# Allegro board 2019-09-26.brd
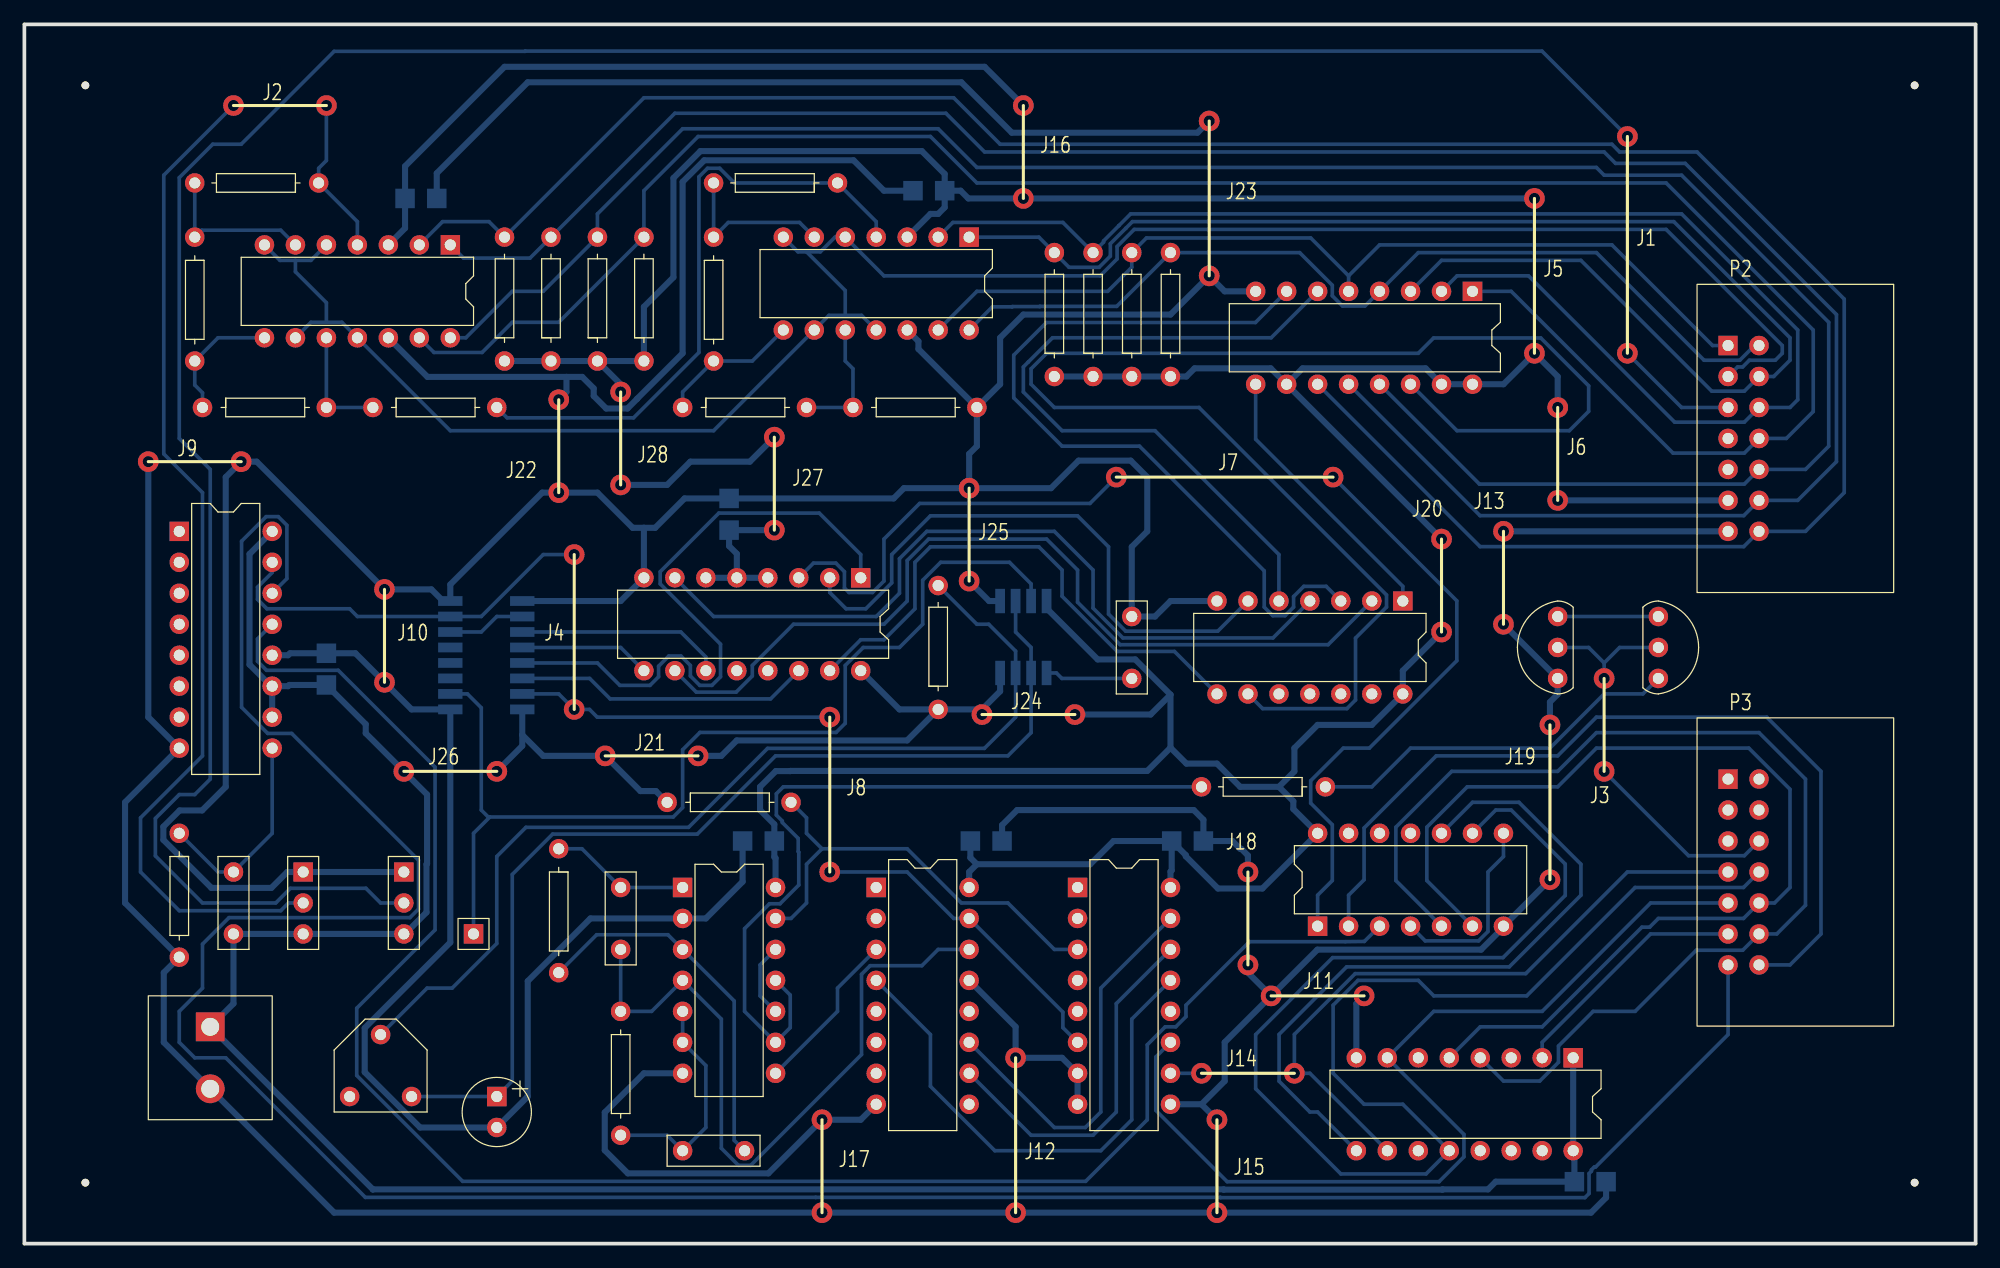
[diagram p0: board, top side]
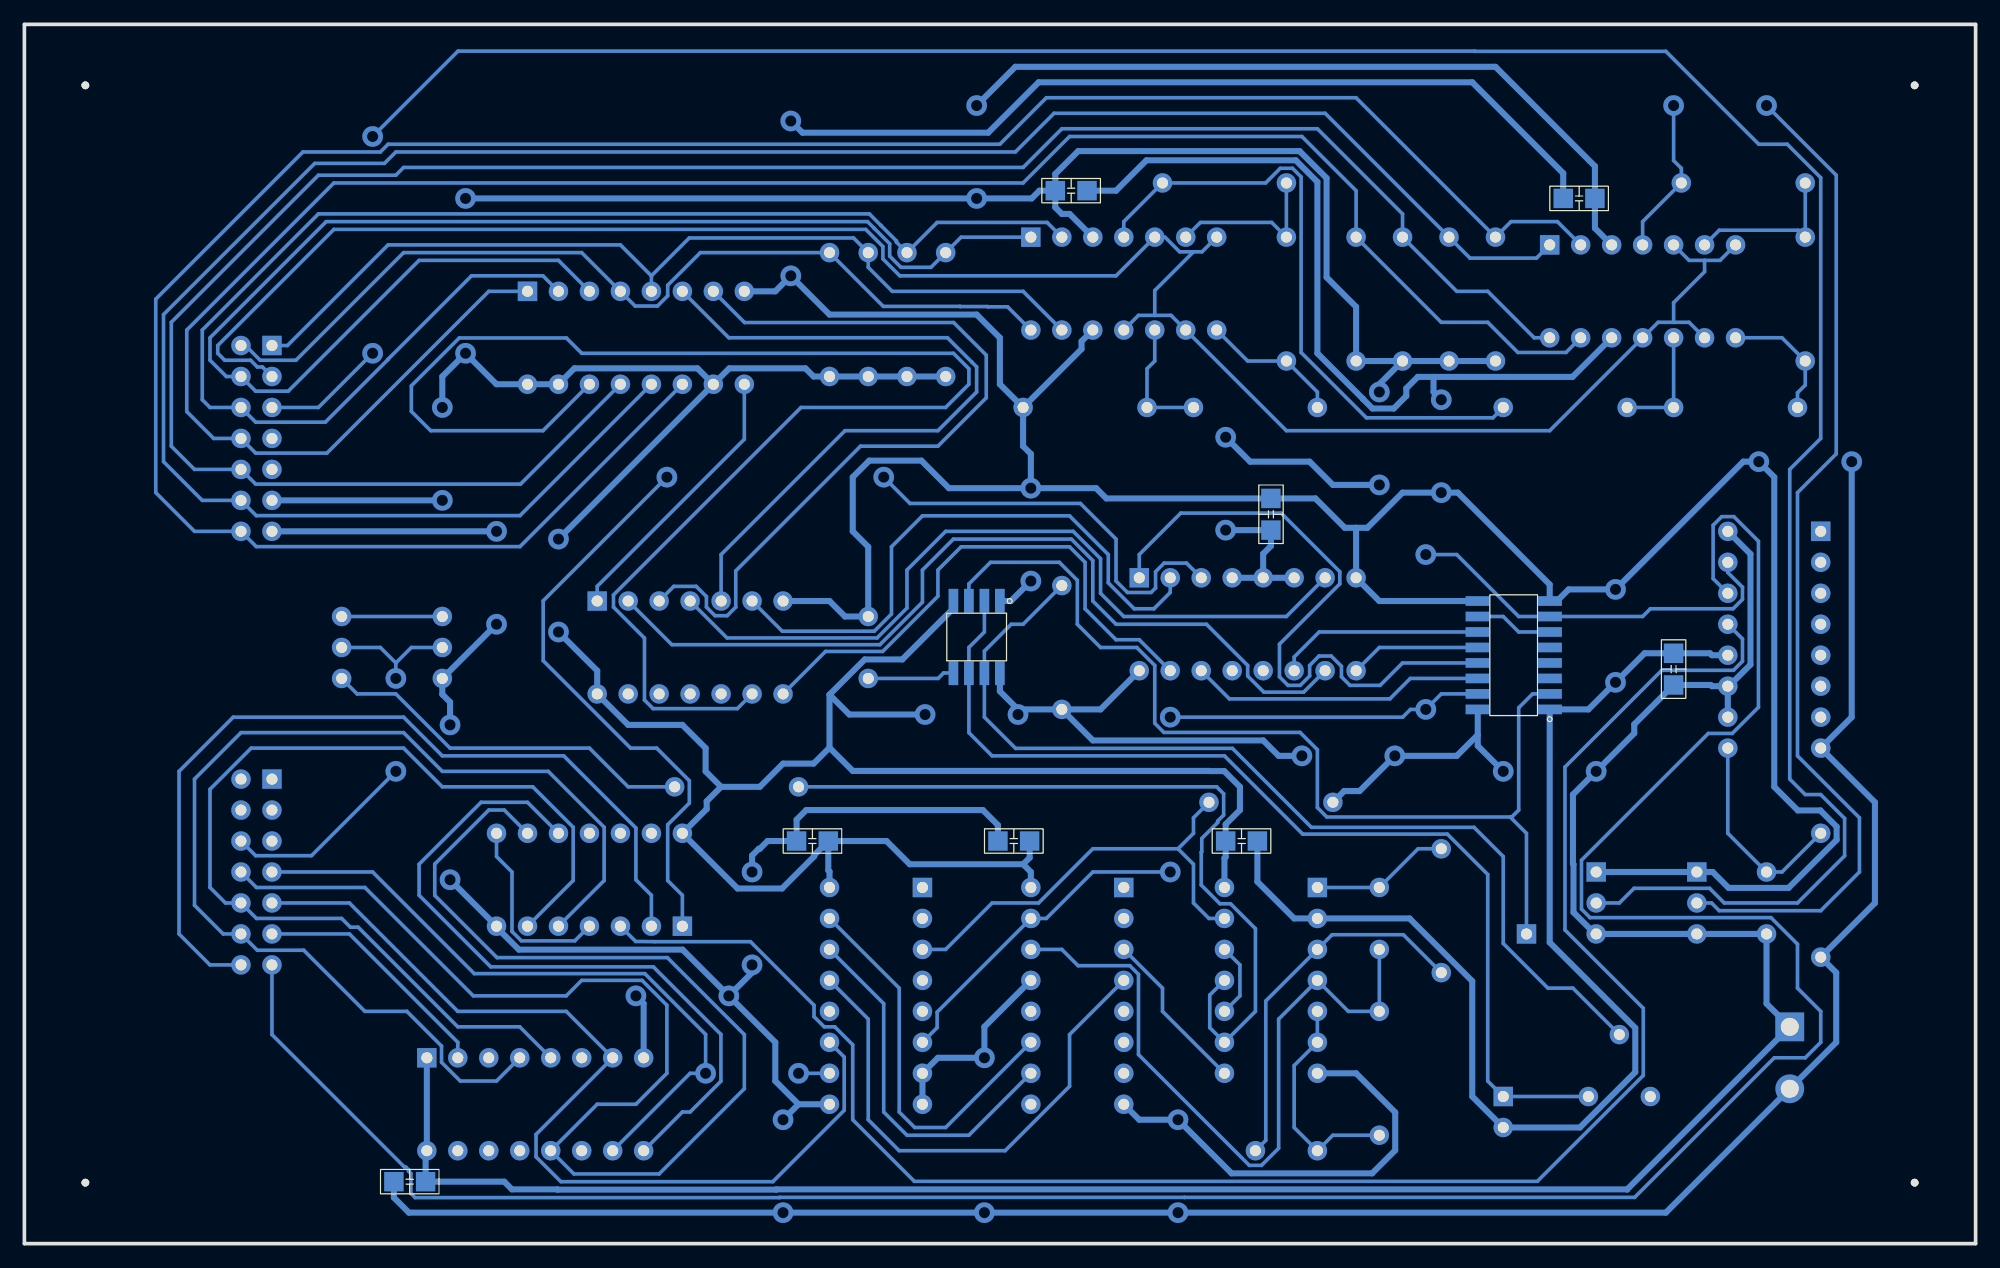
[diagram p1: board, bottom side, seen from below]

Outline 160 x 100 mm; copper layers: TOP, BOTTOM. Coordinates in mm from the lower left corner of the outline.
Outline path: 0,100 0,0 160,0 160,100 0,100

## Design rules (mm)
nets with their own width: min track width 0.5; nets +5V GND

## Placement (name value [footprint] x y rotation side)
C1  10uF  [CAP196]  38.73 12.06 0 top
C2  0.1uF  [CAP300]  90.81 46.35 90 top
C3  0.1uF  [CAP300]  17.14 25.4 90 top
C4  0.01uF  [CAP300]  48.9 29.21 270 top
C5  0.01uF  [CAP300]  59.05 7.62 180 top
C6  0.1uF  [SMDCAP]  31.11 85.72 0 bottom
C7  0.1uF  [SMDCAP]  75.56 86.36 180 bottom
C8  0.1uF  [SMDCAP]  57.78 58.42 90 bottom
C9  0.1uF  [SMDCAP]  24.77 45.72 90 bottom
C10  0.1uF  [SMDCAP]  61.59 33.02 180 bottom
C11  0.1uF  [SMDCAP]  77.47 33.02 0 bottom
C12  0.1uF  [SMDCAP]  93.98 33.02 0 bottom
C13  0.1uF  [SMDCAP]  127 5.08 0 bottom
J1  -  [JUMPER6]  131.44 73.03 270 bottom
J2  -  [JUMPER2]  17.14 93.34 180 bottom
J3  -  [JUMPER2]  129.54 38.73 270 bottom
J4  -  [JUMPER4]  45.09 43.81 270 bottom
J5  -  [JUMPER4]  123.83 73.03 270 bottom
J6  -  [JUMPER2]  125.73 60.96 270 bottom
J7  -  [JUMPER6]  107.31 62.87 0 bottom
J8  -  [JUMPER4]  66.04 30.48 270 bottom
J9  -  [JUMPER2]  10.16 64.14 180 bottom
J10  -  [JUMPER2]  29.53 46.04 270 bottom
J11  -  [JUMPER2]  109.86 20.32 0 bottom
J12  -  [JUMPER4]  81.28 2.54 270 bottom
J13  -  [JUMPER2]  121.28 58.42 90 bottom
J14  -  [JUMPER2]  104.14 13.97 0 bottom
J15  -  [JUMPER2]  97.79 10.16 90 bottom
J16  -  [JUMPER2]  81.92 85.72 270 bottom
J17  -  [JUMPER2]  65.41 2.54 270 bottom
J18  -  [JUMPER2]  100.33 22.86 270 bottom
J19  -  [JUMPER4]  125.09 29.84 270 bottom
J20  -  [JUMPER2]  116.2 50.16 270 bottom
J21  -  [JUMPER2]  47.62 40.01 180 bottom
J22  -  [JUMPER2]  43.81 69.22 90 bottom
J23  -  [JUMPER4]  97.16 79.38 270 bottom
J24  -  [JUMPER2]  78.52 43.4 180 bottom
J25  -  [JUMPER2]  77.47 54.34 270 bottom
J26  -  [JUMPER2]  38.73 38.73 0 bottom
J27  -  [JUMPER2]  61.49 58.52 270 bottom
J28  -  [JUMPER2]  48.9 69.85 90 bottom
NOREF  -  [unnamed]  155 5 0 top
NOREF#2  -  [unnamed]  5 95 0 top
NOREF#3  -  [#2]  0 0 0 top
NOREF#4  -  [#2]  0 0 90 top
NOREF#5  -  [unnamed]  5 5 0 top
NOREF#6  -  [unnamed]  155 95 0 top
P1  CON2  [POWER2]  15.24 17.78 270 top
P2  CON14  [JUMPER14]  139.7 73.66 270 top
P3  CON14  [JUMPER14]  139.7 38.1 270 top
Q1  2SC1815  [TO92]  133.99 51.44 270 top
Q2  2SC1815  [TO92]  125.73 46.35 90 top
R1  10K  [RES400]  74.93 43.81 0 top
R2  10K  [RES400]  24.13 87 90 top
R3  10K  [RES400]  13.97 82.55 180 top
R4  10K  [RES400]  14.61 68.58 270 top
R5  10K  [RES400]  28.57 68.58 270 top
R6  10K  [RES400]  66.67 87 90 top
R7  10K  [RES400]  56.52 82.55 180 top
R8  10K  [RES400]  53.98 68.58 270 top
R9  100  [RES400]  67.94 68.58 270 top
R10  4.7K  [RES400]  39.37 72.39 0 top
R11  4.7K  [RES400]  43.18 72.39 0 top
R12  4.7K  [RES400]  46.99 72.39 0 top
R13  4.7K  [RES400]  50.8 72.39 0 top
R14  4.7K  [RES400]  87.63 71.12 0 top
R15  4.7K  [RES400]  84.45 71.12 0 top
R16  4.7K  [RES400]  93.98 71.12 0 top
R17  4.7K  [RES400]  90.81 71.12 0 top
R18  680K  [RES400]  12.7 33.66 180 top
R19  10K  [RES400]  43.81 32.38 180 top
R20  10K  [RES400]  48.9 19.05 180 top
R21  10K  [RES400]  52.7 36.2 270 top
R22  1K  [RES400]  106.68 37.47 90 top
TP1  TP  [JUMPER1]  36.83 25.4 0 top
U1  NE555  [SOP8]  80.01 52.7 270 bottom
U2  LM339  [DIP14_3]  34.92 81.92 270 top
U3  LM339  [DIP14_3]  77.47 82.55 270 top
U4  40147  [DIP16_3]  118.75 78.11 270 top
U5  4069  [DIP14_3]  113.03 52.7 270 top
U6  4518  [SOP16]  34.92 43.81 0 bottom
U7  4585  [DIP16_3]  68.58 54.61 270 top
U8  4027  [DIP16_3]  12.7 58.42 0 top
U9  4071  [DIP14_3]  106.05 26.04 90 top
U10  4001  [DIP14_3]  53.98 29.21 0 top
U11  4017  [DIP16_3]  69.85 29.21 0 top
U12  4051  [DIP16_3]  86.36 29.21 0 top
U13  4175  [DIP16_3]  127 15.24 270 top
VR1  1M  [RESADJ]  31.75 12.06 270 top
VR2  100K  [JUMPER3]  22.86 30.48 270 top
VR3  10K  [JUMPER3]  31.11 30.48 270 top

## Library data of the parts
C1 = Cap Pol
C2-C5 = Cap NP: Tolerance: ***; User Part Number: ***
C6-C13 = Cap TEXT
J1-J28 = JUMPER
P1 = CON2
P2 P3 = CON14: User Part Number: ***
Q1 Q2 = 2SC1815
R1-R22 = resistor: Tolerance: ***; User Part Number: ***
TP1 = TP: User Part Number: ***
U1 = NE555
U2 U3 = LM339: Tolerance: ***; User Part Number: ***
U4 = 40147: Tolerance: ***; User Part Number: ***
U5 = 4069: Tolerance: ***; User Part Number: ***
U6 = 4518
U7 = 4585: Tolerance: ***; User Part Number: ***
U8 = 4027: Tolerance: ***; User Part Number: ***
U9 = 4071: Tolerance: ***; User Part Number: ***
U10 = 4001: Tolerance: ***; User Part Number: ***
U11 = 4017: Tolerance: ***; User Part Number: ***
U12 = 4051: Tolerance: ***; User Part Number: ***
U13 = 4175: Tolerance: ***; User Part Number: ***
VR1 = VR1: Tolerance: ***; User Part Number: ***
VR2 VR3 = VR2: User Part Number: ***

## Footprints (pads in the part's own frame, mm; a bottom-side part is the same pattern mirrored in y, then rotated)
CAP196
  rect 1.6x1.6 hole 0.914: 1(0,0)
  round 1.6 hole 0.91: 2(0,-2.54)
CAP300
  round 1.6 hole 0.91: 1(0,0) 2(5.08,0)
DIP14_3
  rect 1.6x1.6 hole 0.914: 1(0,0)
  round 1.6 hole 0.91: 2(0,-2.54) 3(0,-5.08) 4(0,-7.62) 5(0,-10.16) 6(0,-12.7) 7(0,-15.24) 8(7.62,-15.24) 9(7.62,-12.7) 10(7.62,-10.16) 11(7.62,-7.62) 12(7.62,-5.08) 13(7.62,-2.54) 14(7.62,0)
DIP16_3
  rect 1.6x1.6 hole 0.914: 1(0,0)
  round 1.6 hole 0.91: 2(0,-2.54) 3(0,-5.08) 4(0,-7.62) 5(0,-10.16) 6(0,-12.7) 7(0,-15.24) 8(0,-17.78) 9(7.62,-17.78) 10(7.62,-15.24) 11(7.62,-12.7) 12(7.62,-10.16) 13(7.62,-7.62) 14(7.62,-5.08) 15(7.62,-2.54) 16(7.62,0)
JUMPER1
  rect 1.6x1.6 hole 0.914: 1(0,0)
JUMPER3
  rect 1.6x1.6 hole 0.914: 1(0,0)
  round 1.6 hole 0.91: 2(2.54,0) 3(5.08,0)
JUMPER14
  rect 1.6x1.6 hole 0.914: 1(0,0)
  round 1.6 hole 0.91: 2(0,2.54) 3(2.54,0) 4(2.54,2.54) 5(5.08,0) 6(5.08,2.54) 7(7.62,0) 8(7.62,2.54) 9(10.16,0) 10(10.16,2.54) 11(12.7,0) 12(12.7,2.54) 13(15.24,0) 14(15.24,2.54)
POWER2
  rect 2.362x2.362 hole 1.473: 1(0,0)
  round 2.362 hole 1.473: 2(5.08,0)
RES400
  round 1.6 hole 0.91: 1(0,0) 2(0,10.16)
RESADJ
  round 1.6 hole 0.91: 1(0,0) 2(-5.08,-2.54) 3(0,-5.08)
SMDCAP
  rect 1.6x1.6 smd: 1(0.1,0) 2(2.7,0)
SOP8
  rect 2x0.8 smd: 1(0,0) 2(0,-1.27) 3(0,-2.54) 4(0,-3.81) 5(5.9,-3.81) 6(5.9,-2.54) 7(5.9,-1.27) 8(5.9,0)
SOP16
  rect 2x0.8 smd: 1(0,0) 2(0,-1.27) 3(0,-2.54) 4(0,-3.81) 5(0,-5.08) 6(0,-6.35) 7(0,-7.62) 8(0,-8.89) 9(5.9,-8.89) 10(5.9,-7.62) 11(5.9,-6.35) 12(5.9,-5.08) 13(5.9,-3.81) 14(5.9,-2.54) 15(5.9,-1.27) 16(5.9,0)
TO92
  round 1.6 hole 0.91: 1(0,0) 2(2.54,0) 3(5.08,0)
unnamed
  round 0.635 hole 3 unplated: (0,0)

## Nets
+5V: C3.1 C6.1 C7.1 C8.1 C9.1 C10.1 C11.1 C12.1 C13.1 P1.1 P2.11 R1.1 R10.1 R11.1 R12.1 R13.1 R14.1 R15.1 R16.1 R17.1 R21.1 U1.4(RST) U1.8(VCC) U2.3 U3.3 U4.10(I\9\) U4.15(I\0\) U4.16(VCC) U5.14 U6.16 U7.4(A>BIN) U7.5(A<BIN) U7.6(A=BIN) U7.16(VCC) U8.10(J) U8.11(K) U8.16 U9.14 U10.14 U11.16(VCC) U12.16(VCC) U13.1(R\S\T\) U13.16(VCC) VR2.3(A) VR3.3(A)
GND: C1.2 C2.2 C6.2 C7.2 C8.2 C9.2 C10.2 C11.2 C12.2 C13.2 P1.2 P2.13 Q2.1(B) R9.2 R18.2 U1.1(GND) U2.12 U3.12 U4.8(GND) U5.7 U6.1(CLK) U6.8 U6.9(CLK) U7.8(GND) U8.8 U8.12(RST) U9.7 U10.2(I1) U10.7 U11.8(GND) U11.13(C\K\E\N\) U12.7(VEE) U12.8(GND) U12.9(C) U13.8(GND) VR2.1(WIPER) VR3.1(WIPER)
AD0: P2.14 R10.2 U2.2(OUT) U4.11(I\1\)
AD1: P2.12 R11.2 U2.1(OUT) U4.12(I\2\)
AD2: P2.10 R12.2 U2.14(OUT) U4.13(I\3\)
AD3: P2.8 R13.2 U2.13(OUT) U4.1(I\4\)
AD4: P2.6 R14.2 U3.2(OUT) U4.2(I\5\)
AD5: P2.4 R15.2 U3.1(OUT) U4.3(I\6\)
AD6: P2.2 R16.2 U3.14(OUT) U4.4(I\7\)
AD7: P2.1 R17.2 U3.13(OUT) U4.5(I\8\)
CLK: TP1.1 U1.3(OUT) U6.2(EN)
MOTOR-GND: P3.6 Q1.2(C) Q2.2(C)
MR: U6.7(CLR) U6.15(CLR) U8.15(Q) U11.15(RST) U12.6(E\N\)
MR2: P3.13 U8.14(Q\)
SW1: P3.14 U9.2(I1)
SW2: P3.12 U9.5(I0) U13.4(D0)
SW3: P3.10 U9.6(I1) U13.5(D1)
SW4: P3.8 U9.9(I1) U13.12(D2)
SWLED1: P3.11 U13.2(Q0)
SWLED2: P3.9 U12.11(A) U13.7(Q1)
SWLED3: P3.7 U12.10(B) U13.10(Q2)
VR3: P2.5 VR3.2(B)
VR-LED: P2.3 U2.5(+IN) U2.7(+IN) U2.9(+IN) U2.11(+IN) U3.5(+IN) U3.7(+IN) U3.9(+IN) U3.11(+IN)
N01738: R2.2 R3.1 U2.6(-IN)
N01832: R2.1 U2.4(-IN) VR2.2(B)
N01869: R3.2 R4.1 U2.8(-IN)
N02026: R4.2 R5.1 U2.10(-IN)
N02113: R5.2 R6.1 U3.4(-IN)
N02200: R6.2 R7.1 U3.6(-IN)
N02287: R7.2 R8.1 U3.8(-IN)
N02374: R8.2 R9.1 U3.10(-IN)
N03318: U4.9(A\) U5.1(I)
N03322: U4.7(B\) U5.3(I)
N03329: U4.6(C\) U5.5(I)
N03383: U4.14(D\) U5.9(I)
N03395: U5.8(O) U7.15(A3)
N03402: U5.6(O) U7.2(A2)
N03414: U5.4(O) U7.7(A1)
N03426: U5.2(O) U7.10(A0)
N03450: U6.11(Q0) U7.11(B0)
N03452: U6.12(Q1) U7.9(B1)
N03454: U6.13(Q2) U7.1(B2)
N03456: U6.14(Q3) U7.14(B3)
N03470: U6.6(Q3) U6.10(EN)
N03744: C3.2 R18.1 U8.9(SET)
N03768: U7.3(A=BOUT) U9.1(I0)
N03793: U8.13(CLK) U9.3(O)
N03830: R1.2 U1.7(DISC) VR1.2
N03834: C1.1 U1.2(TRIG) U1.6(THR) VR1.1
N03876: C2.1 U1.5(CV)
N11046: C4.2 R20.1 U10.4(O) U11.14(CLK)
N11054: C5.2 R20.2 U10.5(I0) U10.6(I1)
N11096: C5.1 R19.2 U10.3(O)
N11143: C4.1 R19.1 U10.1(I0)
N11271: U9.10(O) U13.9(CLK)
N11279: U9.4(O) U9.8(I0)
N11295: U10.8(I0) U11.3(0)
N11327: U11.11(9) U12.15(X2)
N11354: U11.10(4) U12.14(X1)
N11366: U11.4(2) U12.13(X0)
N11378: R21.2 U10.13(I1) U12.3(X)
N11401: U10.10(O) U10.12(I0)
N11416: R22.2 U10.9(I1) U10.11(O)
N11515: Q1.1(B) Q2.3(E)
N11541: Q1.3(E) R22.1

Pads without a net: P2 7 9; P3 1 2 3 4 5; U5 10 11 12 13; U6 3 4 5; U7 12 13; U8 1 2 3 4 5 6 7; U9 11 12 13; U11 1 2 5 6 7 9 12; U12 1 2 4 5 12; U13 3 6 11 13 14 15; VR1 3

## Via types
v1: diameter 1.7, hole 0.91, TOP to BOTTOM, 56 vias

## Routing (per net, layer and track width the routed paths; a pad name or vN(x,y) marks a point on that pad's centre or on a via; arc(x,y) is an arc through that point)
+5V: length 679
  BOTTOM w0.5: v1(123.83,85.72) v1(81.92,85.72) 77.4,85.72 76.77,86.36 C7.1 ; R21.1 51.78,37.12 50.51,37.12 v1(47.62,40.01) 42.55,40.01 40.83,41.73 ; 102.87,37.47 99.69,37.47 97.79,39.37 95.28,39.37 93.98,40.67 ; 102.87,37.47 104.14,38.74 104.14,40.64 106.05,42.55 110.49,42.55 U5.14 113.03,46.99 v1(116.2,50.16) ; 102.87,37.47 104.05,36.28 104.05,35.65 U9.14 101.52,29.13 97.87,29.13 95.24,31.76 95.24,31.86 C12.1 ; U10.14 61.59,31.62 61.49,31.72 C10.1 61.49,34.39 60.33,35.56 60.33,37.46 61.61,38.75 62.8,38.75 62.81,38.77 92.08,38.77 93.98,40.67 ; U12.16 93.98,30.51 94.08,30.61 C12.1 ; U7.5 U7.6 ; U7.5 U7.4 ; U7.5 58.42,56.58 57.78,57.22 C8.1 v1(61.49,58.52) ; C12.1 89.31,33.02 87.4,31.11 78.11,31.11 ; 78.11,31.11 77.47,30.48 U11.16 ; 78.11,31.11 77.57,31.65 C11.1 ; R1.1 78.52,43.81 ; R1.1 71.75,43.81 U7.16 ; R1.1 72.39,41.27 58.42,41.27 57.15,40.01 v1(55.24,40.01) ; 78.52,43.81 80.01,45.3 U1.8 ; 78.52,43.81 v1(78.52,43.4) ; v1(48.9,62.23) 52.7,62.23 54.61,64.14 59.49,64.14 v1(61.49,66.14) ; R15.1 R14.1 R17.1 R16.1 95.28,71.12 95.95,71.79 102.2,71.79 103.5,70.48 ; v1(125.73,68.58) 125.73,71.12 v1(123.83,73.03) 121.28,70.48 U4.16 U4.15 114.9,71.79 104.81,71.79 103.5,70.48 ; C7.1 75.47,87.73 73.59,89.61 55.43,89.61 53.22,87.39 53.22,79.26 50.8,76.83 R13.1 R12.1 ; C7.1 75.47,84.99 74.93,84.45 74.3,84.45 U3.3 ; P2.11 v1(125.73,60.96) ; 93.98,45.02 92.35,43.4 v1(86.14,43.4) ; 93.98,45.02 93.98,40.67 ; 93.98,45.02 91.09,47.91 88.01,47.91 83.82,52.1 U1.4 ; R12.1 48.9,70.48 v1(48.9,69.85) ; R12.1 R11.1 R10.1 ; 40.83,41.73 40.83,40.83 v1(38.73,38.73) ; 40.83,41.73 U6.16 ; v1(81.92,93.34) 78.74,96.52 39.37,96.52 31.21,88.36 C6.1 31.21,83.28 U2.3 ; U8.11 U8.10 ; U8.11 20.23,45.72 18.46,47.49 18.46,56.56 U8.16 ; U8.11 21.62,45.72 21.72,45.82 C9.1 27.99,42.59 27.99,41.86 v1(31.11,38.73) 33.02,36.83 33.02,31.16 32.97,31.11 32.97,27.17 31.2,25.4 VR3.3 VR2.3 C3.1 17.14,19.68 P1.1 28.57,4.45 28.58,4.45 98.33,4.45 98.36,4.43 116.27,4.43 116.3,4.45 120.02,4.45 120.65,5.08 C13.1 127.1,7.52 U13.16 U13.1 ; 103.5,70.48 v1(116.2,57.78)
GND: length 799.8
  BOTTOM w0.5: U2.12 33.05,71.09 44.45,71.09 ; v1(102.23,20.32) 106.03,24.11 119.45,24.11 121.28,25.95 U9.7 v1(125.09,29.84) ; v1(102.23,20.32) 98.42,16.51 98.42,13.34 96.52,11.43 ; v1(102.23,20.32) 100.33,22.23 v1(100.33,22.86) ; U11.8 68.58,10.16 v1(65.41,10.16) 61.01,5.76 49.48,5.76 47.59,7.65 47.59,10.76 50.8,13.97 U10.7 ; VR3.1 VR2.1 21.56,30.48 20.25,29.18 15.33,29.18 11.4,33.11 11.4,34.2 12.73,35.53 14.57,35.53 16.51,37.47 16.51,62.87 v1(17.78,64.14) 19.05,64.14 v1(29.53,53.66) 33.37,53.66 34.33,52.7 U6.8 34.92,54.06 42.46,61.59 v1(43.81,61.59) 46.99,61.59 49.88,58.71 50.8,58.71 ; 44.45,71.09 45.74,71.09 46.68,70.15 46.68,69.52 47.71,68.5 49.46,68.5 50.25,69.29 50.25,69.3 53.98,73.03 53.98,87.08 55.75,88.85 67.99,88.85 70.48,86.36 C7.2 ; 44.45,71.09 44.45,69.85 v1(43.81,69.22) ; 58.9,33.02 58.9,29.68 55.88,26.67 U10.2 46.42,26.67 41.27,21.53 41.27,12.06 C1.2 32.45,9.53 27.91,14.06 27.91,17.69 34.92,24.7 U6.1 31.75,43.81 v1(29.53,46.04) 27.14,48.42 C9.2 21.78,48.42 21.62,48.26 U8.12 ; U3.12 73.31,74.01 73.31,73.37 R9.2 ; P2.13 v1(121.28,58.42) ; C11.2 80.17,34.32 81.41,35.56 95.89,35.56 96.68,34.77 C12.2 99.06,33.02 99.69,32.38 99.78,32.38 100.33,31.83 v1(100.33,30.48) ; U1.1 79.11,52.7 v1(77.47,54.34) ; C13.2 129.7,3.78 128.46,2.54 v1(97.79,2.54) v1(81.28,2.54) v1(65.41,2.54) 25.4,2.54 P1.2 11.43,16.51 11.43,22.23 R18.2 8.26,27.94 8.26,36.2 U8.8 10.16,43.18 v1(10.16,64.14) ; R9.2 78.11,65.41 77.47,64.77 v1(77.47,61.96) ; R9.2 80.01,70.48 80.01,74.3 81.92,76.2 93.98,76.2 v1(97.16,79.38) 98.42,78.11 U4.8 ; 50.8,58.71 U7.8 48.9,52.7 U6.9 ; 50.8,58.71 51.72,58.71 54.13,61.12 C8.2 71.28,61.12 72.12,61.96 v1(77.47,61.96) ; U11.13 81.28,17.78 v1(81.28,15.24) 85.09,15.24 U12.7 U12.8 ; v1(109.86,20.32) 109.22,19.68 U13.8 ; C6.2 33.81,87.79 41.27,95.25 76.83,95.25 80.97,91.12 96.2,91.12 v1(97.16,92.08) ; 96.52,11.43 U12.9 ; 96.52,11.43 v1(97.79,10.16) ; v1(121.28,50.8) Q2.1 125.73,45.05 125.09,44.42 v1(125.09,42.55) ; U5.7 93.98,52.7 92.71,51.44 90.81,51.44 90.81,57.15 92.08,58.42 92.08,62.87 90.72,64.22 86.44,64.22 84.19,61.96 v1(77.47,61.96)
AD0: length 196.1
  BOTTOM w0.3: U2.2 34.29,83.82 38.1,83.82 R10.2 50.8,93.98 76.2,93.98 80.01,90.17 130.18,90.17 130.81,89.53 137.16,89.53 149.22,77.47 149.22,61.59 146.05,58.42 P2.14 140.99,57.17 119.36,57.17 U4.11
AD1: length 184.2
  BOTTOM w0.3: 108.58,70.48 119.36,59.71 140.99,59.71 P2.12 145.41,60.96 148.59,64.14 148.59,76.2 136.19,88.6 130.48,88.6 129.54,89.53 78.74,89.53 75.56,92.71 53.34,92.71 R11.2 41.46,80.83 36.01,80.83 U2.1
AD2: length 179.5
  BOTTOM w0.3: U4.13 119.31,62.3 141.04,62.3 P2.10 146.05,63.5 147.96,65.41 147.96,75.56 135.89,87.63 129.54,87.63 128.91,88.27 78.11,88.27 74.93,91.44 53.98,91.44 46.99,84.45 R12.2 42.55,78.11 40.01,78.11 36.2,74.3 U2.14
AD3: length 172.5
  BOTTOM w0.3: U4.1 121.92,78.11 135.19,64.84 141.04,64.84 P2.8 144.48,66.04 146.69,68.25 146.69,74.93 134.62,87 78.1,87 74.29,90.81 55.24,90.81 50.8,86.36 R13.2 43.81,75.56 40.01,75.56 37.53,73.09 33.59,73.09 U2.13
AD4: length 118.5
  BOTTOM w0.3: U4.2 117.47,79.38 123.34,79.38 130.19,72.52 130.19,72.51 135.32,67.38 141.04,67.38 P2.6 144.78,68.58 145.41,69.22 145.41,74.93 135.89,84.45 90.71,84.45 89.75,83.5 89.75,83.5 88.49,82.24 88.49,82.14 R14.2 85.16,83.75 76.13,83.75 U3.2
AD5: length 113.9
  BOTTOM w0.3: U3.1 83.19,82.55 R15.2 85.66,80.08 88.13,80.08 89.05,80.99 89.05,82.01 90.31,83.27 90.86,83.82 135.25,83.82 144.78,74.3 144.78,72.46 143.44,71.12 P2.4 141.04,69.92 138.36,69.92 127.63,80.64 116.2,80.64 U4.3
AD6: length 75.7
  BOTTOM w0.3: U3.14 79.38,76.83 80.99,76.83 81.01,76.85 83.26,76.85 83.28,76.87 89.57,76.87 R16.2 104.57,81.28 107.25,78.6 107.25,77.74 108.09,76.9 109.92,76.9 U4.4 114.3,81.28 128.91,81.28 137.73,72.46 140.67,72.46 141.6,73.38 141.96,73.38 P2.2
AD7: length 75.6
  BOTTOM w0.3: 108.58,79.38 105.48,82.48 92.01,82.48 R17.2 90.81,80.08 88.83,78.11 78.11,78.11 U3.13 ; 108.58,79.38 108.58,78.11 ; 108.58,79.38 111.12,81.92 130.18,81.92 138.43,73.66 P2.1
CLK: length 85.3
  BOTTOM w0.3: TP1.1 36.83,33.66 38.17,34.99 ; U1.3 82.55,54.11 80.78,55.88 75.13,55.88 73.66,54.41 73.66,50.8 71.76,48.9 68.78,48.9 67.31,47.42 67.31,42.68 66.56,41.93 55.39,41.93 53.98,40.51 53.98,35.76 53.2,34.99 38.17,34.99 ; 38.17,34.99 38.03,34.99 37.47,35.56 37.47,43.95 36.33,45.09 U6.2
MOTOR-GND: length 26.6
  BOTTOM w0.3: v1(129.54,46.35) 129.54,47.62 ; 129.54,47.62 128.27,48.9 125.73,48.9 ; 129.54,47.62 130.81,48.9 Q1.2 ; v1(129.54,38.73) 136.46,31.82 141.04,31.82 P3.6
MR: length 85
  BOTTOM w0.3: v1(66.04,43.18) 46.97,43.18 46.34,43.81 v1(45.09,43.81) 43.81,45.09 U6.15 ; U8.15 20.32,55.04 19.12,53.84 19.12,52.84 19.89,52.07 26.67,52.07 27.3,51.44 37.47,51.44 42.55,56.52 v1(45.09,56.52) ; v1(66.04,30.48) 72.39,30.48 76.2,26.67 U11.15 85.16,18.98 85.16,17.71 U12.6
MR2: length 220.6
  BOTTOM w0.3: P3.13 139.7,17.14 128.84,6.28 128.73,6.28 128.5,6.05 128.5,5.94 128.3,5.75 128.3,4.11 127.96,3.77 98.09,3.77 98.06,3.79 64.89,3.79 64.88,3.79 27.96,3.79 16.51,15.24 13.97,15.24 12.7,16.51 12.7,19.05 14.61,20.95 14.61,24.56 16.78,26.74 31.61,26.74 32.32,27.44 32.32,31.45 21.92,41.84 19.95,41.84 17.81,43.99 17.81,57.61 19.82,59.62 20.82,59.62 21.52,58.92 21.52,54.54 U8.14
SW1: length 71.1
  BOTTOM w0.3: 108.58,26.04 108.58,28.57 109.86,29.84 109.86,34.09 115.77,40.01 125.73,40.01 128.9,43.18 142.88,43.18 147.32,38.73 147.32,25.4 144.78,22.86 P3.14
SW2: length 92.6
  BOTTOM w0.3: U9.5 112.46,29.78 112.46,34.15 117.04,38.73 125.73,38.73 128.91,41.91 142.24,41.91 146.05,38.1 146.05,27.75 143.7,25.4 P3.12 140.9,24.06 137.09,24.06 132.08,19.05 128.64,19.05 125.8,16.21 125.8,14.87 124.26,13.34 121.28,13.34 U13.4
SW3: length 85.3
  BOTTOM w0.3: U13.5 119.38,17.78 124.46,17.78 132.63,25.95 133.27,25.95 133.99,26.67 140.97,26.67 P3.10 143.51,27.94 144.78,29.21 144.78,37.26 141.4,40.64 128.91,40.64 125.73,37.47 118.31,37.47 115,34.15 115,29.78 U9.6
SW4: length 125.2
  BOTTOM w0.3: P3.8 140.97,29.21 132.08,29.21 123.19,20.32 115.57,20.32 114.3,21.59 109.35,21.59 107.31,19.55 107.31,13.97 109.86,11.43 113.03,11.43 U13.12 114.94,5.71 107.95,5.71 100.97,12.7 100.97,17.14 107.28,23.46 121.25,23.46 126.35,28.56 126.35,31.13 121.92,35.56 120.65,35.56 U9.9
SWLED1: length 20.2
  BOTTOM w0.3: P3.11 133.35,25.4 124.46,16.51 U13.2
SWLED2: length 78.5
  BOTTOM w0.3: P3.9 133.35,27.94 124.46,19.05 115.57,19.05 U13.7 118.04,8.96 118.04,7.12 116,5.08 98.63,5.08 92.78,10.93 92.78,15.31 U12.11
SWLED3: length 57.1
  BOTTOM w0.3: v1(96.52,13.97) U12.10 ; P3.7 131.44,30.48 123.11,22.14 109.12,22.14 104.14,17.16 v1(104.14,13.97) 105.41,13.97 U13.10
VR3: length 218.3
  BOTTOM w0.3: VR3.2 29.21,27.94 28.01,29.14 21.81,29.14 20.61,27.94 14.61,27.94 10.74,31.8 10.74,34.87 12.7,36.83 13.97,36.83 15.24,38.1 15.24,63.5 12.7,66.04 12.7,87.43 15.44,90.17 17.78,90.17 25.4,97.79 41.05,97.79 41.07,97.81 124.44,97.81 v1(131.44,90.81) ; P2.5 135.89,68.58 v1(131.44,73.03)
VR-LED: length 171.3
  BOTTOM w0.3: 24.77,75.56 24.77,77.17 22.23,79.71 22.23,80.64 ; 24.77,75.56 26.04,75.56 U2.11 34.92,66.67 56.52,66.67 U3.9 65.97,76.13 67.31,76.13 ; 24.77,75.56 23.5,75.56 U2.9 ; 64.14,81.35 65.27,81.35 66.47,82.55 U3.5 70.48,79.38 88.21,79.38 89.6,80.76 89.6,81.78 91.01,83.19 134.62,83.19 144.15,73.66 144.15,73.03 143.58,72.46 141.45,72.46 140.9,71.9 140.48,71.9 P2.3 ; 64.14,81.35 67.31,78.17 67.31,76.13 ; 64.14,81.35 63.43,81.35 U3.7 ; 22.23,80.64 20.95,80.64 U2.7 ; 22.23,80.64 23.5,80.64 U2.5 ; 67.31,76.13 68.65,76.13 U3.11
N01738: length 13.4
  BOTTOM w0.3: U2.6 21.02,83.12 14.54,83.12 R3.1 R2.2
N01832: length 96.6
  BOTTOM w0.3: U2.4 27.3,83.82 R2.1 24.13,88.2 24.77,88.83 v1(24.77,93.34) ; VR2.2 21.66,27.94 21.02,27.3 12.7,27.3 9.53,30.48 9.53,34.92 14.61,40.01 14.61,61.59 11.43,64.77 11.43,87.63 v1(17.14,93.34)
N01869: length 10.6
  BOTTOM w0.3: U2.8 15.88,74.3 R3.2 13.97,70.42 14.61,69.78 R4.1
N02026: length 9.5
  BOTTOM w0.3: R5.1 R4.2 U2.10
N02113: length 51.5
  BOTTOM w0.3: U3.4 69.85,83.82 R6.1 58.22,87 57.01,88.2 56.02,88.2 55.31,87.49 55.31,73.09 49.95,67.73 39.59,67.73 R5.2
N02200: length 13.7
  BOTTOM w0.3: R6.2 R7.1 57.72,83.75 63.57,83.75 U3.6
N02287: length 11.6
  BOTTOM w0.3: R8.1 53.98,69.85 R7.2 59.69,72.39 U3.8
N02374: length 10.4
  BOTTOM w0.3: R8.2 R9.1 67.94,71.75 67.31,72.39 U3.10
N03318: length 22.8
  BOTTOM w0.3: U4.9 100.97,65.97 113.03,53.91 U5.1
N03322: length 66
  BOTTOM w0.3: U5.3 106.75,53.91 104.91,53.91 104.07,53.07 104.07,52.21 103.37,51.5 102.37,51.5 101.67,52.21 101.67,55.18 91.44,65.41 85.09,65.41 81.13,69.37 81.13,72.87 83.8,75.55 100.95,75.55 103.5,78.11
N03329: length 59
  BOTTOM w0.3: U4.6 102.23,74.3 84.31,74.3 82.32,72.31 81.92,71.9 81.92,69.85 85.09,66.67 92.71,66.67 102.87,56.51 U5.5
N03383: length 124.2
  BOTTOM w0.3: U4.14 117.47,66.67 126.68,66.67 128.27,68.26 128.27,70.35 124.34,74.28 115.55,74.28 114.3,73.03 83.82,73.03 82.55,71.75 82.55,70.48 84.45,68.58 96.32,68.58 111.69,53.2 111.69,52.21 109.15,49.67 109.15,44.59 108.45,43.88 101.53,43.88 U5.9
N03395: length 44.4
  BOTTOM w0.3: U7.15 68.58,49.53 70.48,49.53 73.03,52.07 73.03,55.88 74.3,57.15 83.19,57.15 85.09,55.24 85.09,53.1 89.62,48.57 94.31,48.57 U5.8
N03402: length 48.7
  BOTTOM w0.3: U7.2 66.04,53.41 67.38,52.07 68.99,52.07 71.12,54.2 71.12,56.52 74.3,59.69 86.36,59.69 88.9,57.15 88.9,51.64 90.31,50.23 97.86,50.23 U5.6
N03414: length 64.6
  BOTTOM w0.3: U7.7 56.52,51.44 69.85,51.44 71.75,53.34 71.75,56.18 74,58.42 84.45,58.42 87.63,55.24 87.63,52.12 90.08,49.68 102.38,49.68 U5.4
N03426: length 72.1
  BOTTOM w0.3: U7.10 55.1,45.23 58.36,45.23 59.69,46.56 59.69,47.42 63.07,50.8 70.49,50.8 72.39,52.7 72.39,56.03 74.15,57.78 83.82,57.78 86.36,55.24 86.36,52.61 89.85,49.12 106.91,49.12 U5.2
N03450: length 17
  BOTTOM w0.3: U7.11 55.88,48.11 53.83,50.16 U6.11
N03452: length 10.8
  BOTTOM w0.3: U7.9 48.9,48.9 40.83,48.9
N03454: length 52.7
  BOTTOM w0.3: U7.1 68.58,56.52 65.18,59.92 56.94,59.92 52.14,55.11 52.14,54.11 57.08,49.16 57.08,46.49 56.38,45.79 55.38,45.79 54.61,46.56 54.61,47.42 53.84,48.19 52.84,48.19 52,47.36 52,46.49 51.3,45.79 48.83,45.79 46.99,47.62 U6.13
N03456: length 24.3
  BOTTOM w0.3: U7.14 61.19,44.68 48.03,44.68 46.35,46.35 U6.14
N03470: length 6.4
  BOTTOM w0.3: U6.6 37.47,50.16 38.73,51.44 40.83,51.44
N03744: length 17.2
  BOTTOM w0.3: U8.9 20.32,33.66 C3.2 15.88,30.48 R18.1
N03768: length 82.7
  BOTTOM w0.3: v1(107.31,62.87) 117.46,52.72 117.46,47.81 110.29,40.64 108.15,40.64 105.48,37.96 105.48,36.13 107.25,34.36 107.25,29.78 106.05,28.57 U9.1 ; U7.3 64.7,55.81 66.54,55.81 67.24,55.11 67.24,53.77 67.61,53.41 69.55,53.41 70.48,54.34 70.48,57.79 73.41,60.71 87.38,60.71 v1(89.53,62.87)
N03793: length 149.9
  BOTTOM w0.3: U8.13 19.12,49.6 19.12,47.76 19.85,47.02 25.73,47.02 33.67,39.08 33.67,25.73 27.25,19.31 27.25,13.79 35.94,5.11 87.02,5.11 92.08,10.16 92.08,16.31 93.55,17.78 94.41,17.78 95.25,18.62 95.25,19.55 100.46,24.77 108.33,24.77 109.87,24.78 U9.3
N03830: length 81
  BOTTOM w0.3: 74.93,53.98 78.11,50.8 79.08,50.8 81.28,48.59 U1.7 81.28,43.18 78.72,40.62 60.94,40.62 54.46,34.14 41.13,34.14 38.73,31.75 38.73,24.62 35.07,20.95 33.02,20.95 VR1.2
N03834: length 84.4
  BOTTOM w0.3: VR1.1 C1.1 40.01,13.34 40.01,30.28 43.32,33.59 55.18,33.59 61.59,40.01 80.64,40.01 82.55,41.91 U1.6 82.55,48.9 81.28,50.16 U1.2
N03876: length 7.2
  BOTTOM w0.3: C2.1 85.07,46.35 84.62,46.8 U1.5
N11046: length 58.4
  BOTTOM w0.3: U11.14 74.93,24.13 73.59,22.79 69.35,22.79 68.65,22.09 68.65,15.51 59.55,6.42 58.56,6.42 57.15,7.82 57.15,18.41 U10.4 51.44,19.05 R20.1 C4.2
N11054: length 18.6
  BOTTOM w0.3: U10.5 U10.6 55.88,14.61 55.88,9.53 C5.2 52.7,8.89 R20.2
N11096: length 30.6
  BOTTOM w0.3: R19.2 46.92,25.33 52.77,25.33 U10.3 58.2,19.9 58.2,8.47 C5.1
N11143: length 11.5
  BOTTOM w0.3: U10.1 C4.1 45.72,32.38 R19.1
N11271: length 59.1
  BOTTOM w0.3: U9.10 118.75,36.2 122.56,36.2 127.64,31.11 127.64,28.57 121.76,22.7 108.42,22.7 102.89,17.16 102.89,13.32 105.41,10.79 106.05,10.79 U13.9
N11279: length 15.7
  BOTTOM w0.3: U9.4 114.87,24.83 119.24,24.83 120.02,25.6 120.02,30.48 121.28,31.75 U9.8
N11295: length 13.6
  BOTTOM w0.3: U10.8 66.67,19.05 66.67,20.95 U11.3
N11327: length 32.5
  BOTTOM w0.3: U11.11 84.45,9.53 87,9.53 88.27,10.79 88.27,20.95 U12.15
N11354: length 30.1
  BOTTOM w0.3: U12.14 89.53,19.68 89.53,10.8 87.63,8.89 82.55,8.89 U11.10
N11366: length 43
  BOTTOM w0.3: U12.13 90.81,18.41 90.81,10.16 88.27,7.62 79.58,7.62 74.3,12.9 74.3,17.14 U11.4
N11378: length 37.3
  BOTTOM w0.3: U10.13 62.87,26.67 64.14,27.94 64.14,31.11 65.41,32.38 ; 65.41,32.38 64.14,33.66 64.14,34.92 R21.2 ; 65.41,32.38 72.39,32.38 76.83,27.94 80.64,27.94 84.45,24.13 U12.3
N11401: length 6.1
  BOTTOM w0.3: U10.10 60.33,20.32 60.33,22.86 U10.12
N11416: length 65.7
  BOTTOM w0.3: R22.2 62.23,37.47 61.66,36.9 61.66,35.15 62.15,34.66 62.15,34.54 63.45,33.23 63.45,32.16 63.5,32.11 63.5,29.41 61.96,27.87 61.1,27.87 59.05,25.83 59.05,19.05 U10.9 62.8,17.71 62.8,20.39 U10.11
N11515: length 8.3
  BOTTOM w0.3: 125.73,51.44 Q1.1
N11541: length 31
  BOTTOM w0.3: Q1.3 132.72,45.09 129.54,45.09 125.09,40.64 113.67,40.64 110.49,37.47 R22.1

## Text on the board
DIMENSION: FIGURE | SIZE | 0.91 | 0.914 | 1.4732 | 3.0 | DRILL CHART: TOP to BOTTOM | ALL UNITS ARE IN MILLIMETERS | PLATED | NON-PLATED | QTY | 303 | 17 | 1 | 4
